# Altium PCB SPI-主板-开关.PcbDoc (part 10 of 11)
Units mm, origin at the board's own origin, x right, y up, seen from the top; angles counter-clockwise.
Board outline 97.69 x 103.45 mm, 2 copper layers (Top Layer, Bottom Layer); 86 components, 63 nets, 260 pads, 250 vias.
Unrouted connection lines stored in the file: 6.
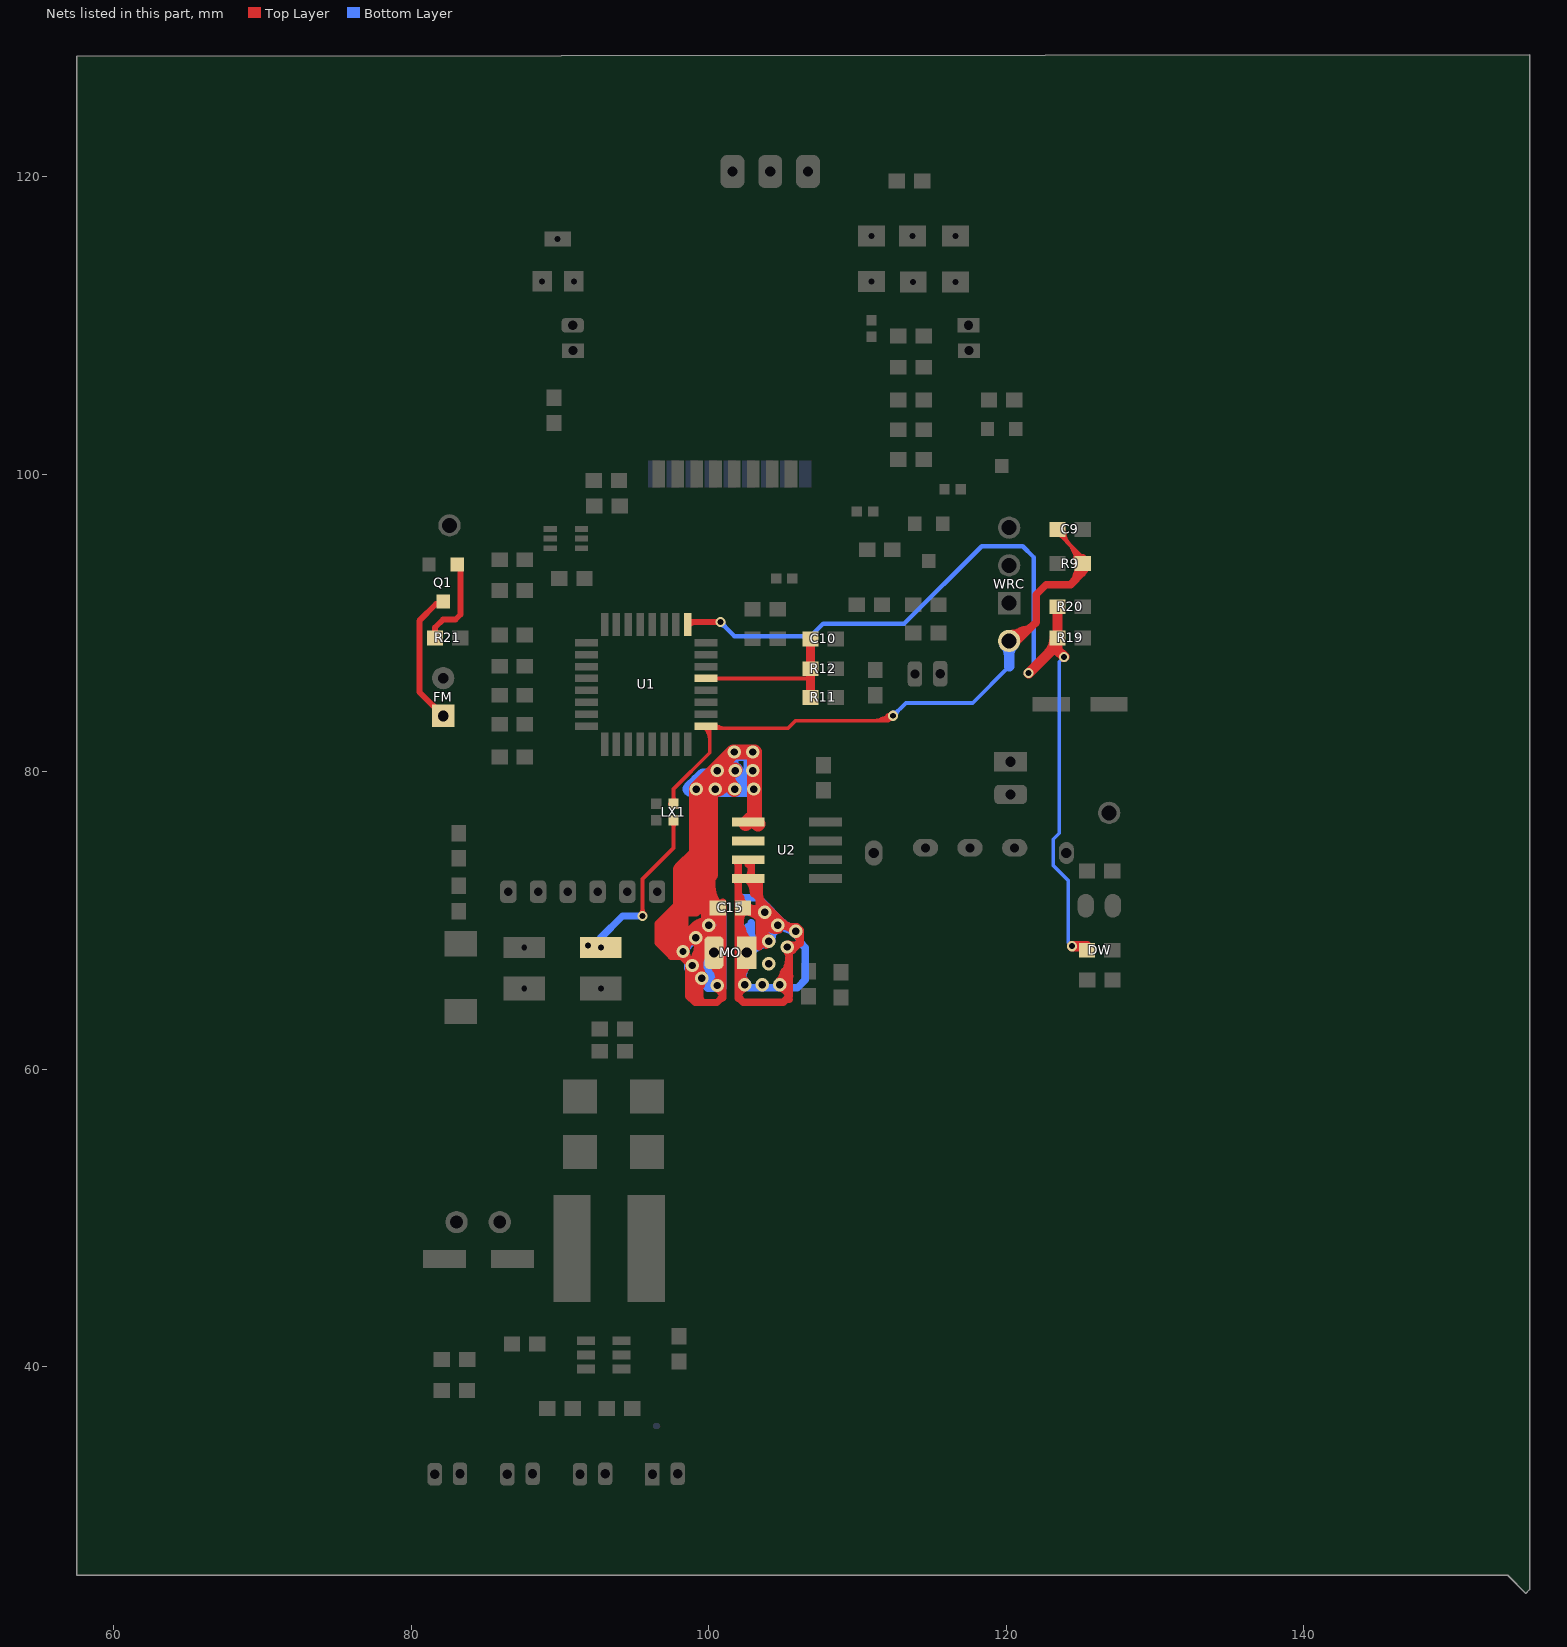
[diagram p10: the nets of this part, all layers, seen from the top]

## Via types
v1: diameter 0.9, hole 0.5, Top Layer to Bottom Layer, 104 vias
v2: diameter 0.68, hole 0.4, Top Layer to Bottom Layer, 100 vias
v3: diameter 1.1, hole 0.6, Top Layer to Bottom Layer, tented both sides, 16 vias
v4: diameter 1, hole 0.8, Top Layer to Bottom Layer, tented both sides, 8 vias
v5: diameter 1, hole 0.6, Top Layer to Bottom Layer, 4 vias
v6: diameter 0.8, hole 0.5, Top Layer to Bottom Layer, 4 vias
v7: diameter 0.7, hole 0.4, Top Layer to Bottom Layer, 4 vias
v8: diameter 0.6, hole 0.4, Top Layer to Bottom Layer, 3 vias
v9: diameter 1.1, hole 0.68, Top Layer to Bottom Layer, 2 vias
v10: diameter 0.8, hole 0.4, Top Layer to Bottom Layer, 2 vias
v11: diameter 1, hole 0.5, Top Layer to Bottom Layer, 1 vias
v12: diameter 0.9, hole 0.6, Top Layer to Bottom Layer, tented bottom, 1 vias
v13: diameter 1.2, hole 0.68, Top Layer to Bottom Layer, 1 vias

## Nets (pads, with @x,y where several pads share a name; then routed paths per layer and width w, separated by ;. In a path a pad name is that pad's centre, name@x,y a point inside that pad or via, vN(x,y) a via of type N, cw(c..) or ccw(c..) an arc to the next point about the centre after c; other vN are vias at no path point) (continued)
NetC4_1: (continued)
  Bottom Layer w1: 99.263,79.375 99.276,79.375 ; v1@99.113,78.832 cw(c99.699,78.952) 99.276,79.375 ; v1@99.113,78.832 cw(c99.699,78.952) 99.276,79.375 ; v1@99.113,78.832 cw(c99.699,78.952) 99.276,79.375 ; v1@99.113,78.832 cw(c99.699,78.952) 99.276,79.375 ; v1@99.113,78.832 cw(c99.699,78.952) 99.276,79.375 ; v1@99.113,78.832 cw(c99.699,78.952) 99.276,79.375 ; v1@99.112,78.842 cw(c100.003,78.842) 99.373,79.472 ; v1@99.112,78.842 cw(c100.003,78.842) 99.373,79.472 ; v1@99.112,78.842 cw(c100.003,78.842) 99.373,79.472 ; v1@99.126,78.877 cw(c100.329,77.675) 100.329,79.375 ; v1@99.126,78.877 cw(c100.329,77.675) 100.329,79.375 ; v1@99.126,78.877 cw(c100.329,77.675) 100.329,79.375 ; 99.276,79.375 ccw(c99.276,81.049) v1@100.624,80.057 ; 99.276,79.375 cw(c99.276,77.702) v1@100.467,78.877 ; 99.276,79.375 ccw(c99.276,81.049) v1@100.624,80.057 ; 99.276,79.375 cw(c99.276,77.702) v1@100.467,78.877 ; 99.276,79.375 ccw(c99.276,81.049) v1@100.624,80.057 ; 99.276,79.375 cw(c99.276,77.702) v1@100.467,78.877 ; 99.276,79.375 99.632,79.731 100.254,79.731 ; 99.276,79.375 98.749,78.848 98.806,78.791 101.194,78.791 ; 99.276,79.375 100.609,79.375 ; 100.254,79.731 cw(c99.614,79.091) v1@100.479,78.827 ; 100.254,79.731 cw(c99.614,79.091) v1@100.479,78.827 ; 100.254,79.731 cw(c99.614,79.091) v1@100.479,78.827 ; 100.254,79.731 100.609,79.375 ; v1@100.388,78.867 cw(c100.935,78.551) 100.772,79.161 ; v1@100.388,78.867 cw(c100.935,78.551) 100.772,79.161 ; v1@100.388,78.867 cw(c100.935,78.551) 100.772,79.161 ; v1@100.388,78.867 cw(c100.935,78.551) 100.772,79.161 ; v1@100.388,78.867 cw(c100.935,78.551) 100.772,79.161 ; v1@100.388,78.867 cw(c100.935,78.551) 100.772,79.161 ; v1@100.396,78.877 cw(c101.108,78.165) 101.108,79.172 ; v1@100.396,78.877 cw(c101.599,77.675) 101.599,79.375 ; v1@100.397,78.877 cw(c100.84,78.425) 101.157,78.973 ; v1@100.396,78.877 cw(c101.108,78.165) 101.108,79.172 ; v1@100.396,78.877 cw(c101.599,77.675) 101.599,79.375 ; v1@100.397,78.877 cw(c100.84,78.425) 101.157,78.973 ; v1@100.397,78.877 cw(c100.84,78.425) 101.157,78.973 ; v1@100.396,78.877 cw(c101.108,78.165) 101.108,79.172 ; v1@100.396,78.877 cw(c101.599,77.675) 101.599,79.375 ; v1@100.397,78.877 cw(c100.84,78.425) 101.157,78.973 ; v1@100.397,78.877 cw(c100.84,78.425) 101.157,78.973 ; v1@100.397,78.877 cw(c100.84,78.425) 101.157,78.973 ; v1@100.405,78.884 cw(c100.74,78.337) 101.194,78.791 ; v1@100.405,78.884 cw(c100.74,78.337) 101.194,78.791 ; v1@100.405,78.884 cw(c100.74,78.337) 101.194,78.791 ; v1@100.425,79.902 cw(c101.273,79.054) v1@101.8,80.131 ; v1@100.425,79.902 cw(c101.273,79.054) v1@101.8,80.131 ; v1@100.425,79.902 cw(c101.273,79.054) v1@101.8,80.131 ; v1@100.425,79.902 v1@101.752,81.229 ; v1@100.453,78.796 ccw(c100.225,79.283) 100.737,79.446 ; v1@100.453,78.796 ccw(c100.225,79.283) 100.737,79.446 ; v1@100.453,78.796 ccw(c100.225,79.283) 100.737,79.446 ; v1@100.535,80.096 ccw(c101.533,79.892) 100.813,79.172 ; v1@100.535,80.096 ccw(c101.533,79.892) 100.813,79.172 ; v1@100.535,80.096 ccw(c101.533,79.892) 100.813,79.172 ; v1@100.535,80.096 ccw(c101.533,79.892) 100.813,79.172 ; v1@100.543,80.115 ccw(c101.019,79.785) 100.609,79.375 ; v1@100.543,80.115 ccw(c101.019,79.785) 100.609,79.375 ; v1@100.543,80.115 ccw(c101.019,79.785) 100.609,79.375 ; v1@100.543,80.115 ccw(c101.019,79.785) 100.609,79.375 ; 100.609,79.375 ccw(c100.609,80.788) v1@101.821,80.06 ; 100.609,79.375 cw(c100.609,77.732) v1@101.788,78.876 ; 100.609,79.375 ccw(c100.609,80.788) v1@101.821,80.06 ; 100.609,79.375 cw(c100.609,77.732) v1@101.788,78.876 ; 100.609,79.375 ccw(c100.609,80.788) v1@101.821,80.06 ; 100.609,79.375 cw(c100.609,77.732) v1@101.788,78.876 ; 100.609,79.375 101.905,79.375 ; 100.609,79.375 100.813,79.172 ; 100.813,79.172 ccw(c100.813,80.193) v1@101.827,80.081 ; 100.813,79.172 ccw(c101.731,80.09) v1@101.753,78.792 ; 100.813,79.172 ccw(c100.813,80.193) v1@101.827,80.081 ; 100.813,79.172 ccw(c101.731,80.09) v1@101.753,78.792 ; 100.813,79.172 ccw(c100.813,80.193) v1@101.827,80.081 ; 100.813,79.172 ccw(c101.731,80.09) v1@101.753,78.792 ; 100.813,79.172 v1@101.702,79.172 ; 100.813,79.172 101.194,78.791 ; 101.076,79.172 cw(c101.076,78.165) v1@101.788,78.877 ; 101.076,79.172 cw(c101.076,78.165) v1@101.788,78.877 ; 101.076,79.172 cw(c101.076,78.165) v1@101.788,78.877 ; 101.194,78.791 103.073,78.791 v1@103.073,81.229 ; 101.235,79.297 cw(c100.996,78.405) v1@101.796,78.867 ; 101.235,79.297 cw(c100.996,78.405) v1@101.796,78.867 ; 101.235,79.297 cw(c100.996,78.405) v1@101.796,78.867 ; v1@101.702,79.172 ccw(c101.155,79.719) v1@101.821,80.112 ; v1@101.702,79.172 cw(c101.702,80.376) 100.536,80.074 ccw(c101.702,80.376) v1@101.702,79.172 ; v1@101.702,79.172 ccw(c101.155,79.719) v1@101.821,80.112 ; v1@101.702,79.172 ccw(c101.155,79.719) v1@101.821,80.112 ; v1@101.702,79.172 101.905,79.375 ; v1@101.703,78.838 cw(c102.397,78.883) 101.905,79.375 ; v1@101.703,78.838 cw(c102.397,78.883) 101.905,79.375 ; v1@101.703,78.838 cw(c102.397,78.883) 101.905,79.375 ; v1@101.715,78.875 cw(c102.845,77.85) 102.845,79.375 ; v1@101.715,78.875 cw(c102.845,77.85) 102.845,79.375 ; v1@101.715,78.875 cw(c102.845,77.85) 102.845,79.375 ; v1@101.733,80.064 ccw(c102.845,80.616) 102.845,79.375 ; v1@101.733,80.064 ccw(c102.845,80.616) 102.845,79.375 ; v1@101.733,80.064 ccw(c102.845,80.616) 102.845,79.375 ; v1@101.742,80.051 cw(c102.347,80.635) v1@101.752,81.229 ; v1@101.742,80.051 cw(c102.347,80.635) v1@101.752,81.229 ; v1@101.742,80.051 cw(c102.347,80.635) v1@101.752,81.229 ; v1@101.752,81.229 v1@103.073,81.229 ; 101.905,79.375 ccw(c101.905,80.616) v1@103.016,80.064 ; 101.905,79.375 cw(c101.905,77.791) v1@103.059,78.876 ; 101.905,79.375 cw(c101.905,81.075) 100.544,80.056 ccw(c101.905,81.075) 101.905,79.375 ; 101.905,79.375 ccw(c101.905,80.616) v1@103.016,80.064 ; 101.905,79.375 cw(c101.905,77.791) v1@103.059,78.876 ; 101.905,79.375 ccw(c101.905,80.616) v1@103.016,80.064 ; 101.905,79.375 cw(c101.905,77.791) v1@103.059,78.876 ; 101.905,79.375 102.845,79.375 ; 102.845,79.375 102.845,81.077 102.921,81.077 v1@103.073,81.229 ; 99.846,79.731 ccw(c99.846,80.824) 100.619,80.051 cw(c99.846,80.824) 99.846,79.731 ; v1@100.534,80.086 ccw(c102.069,80.086) 100.984,79.001 cw(c102.069,80.086) v1@100.534,80.086
  other v1: 100.584,65.634 99.543,66.116 98.908,66.98 98.273,67.92 99.136,68.834 100,69.698 100.432,78.842 101.752,78.842 103.022,78.842 100.584,80.086 101.778,80.086 102.972,80.086 101.727,81.331 102.972,81.331
NetC4_2: C15.2 MO.1 U2.7 U2.8 | length 479.8
  Top Layer w0.5: 101.981,73.762 101.981,64.872 102.337,64.516 105.004,64.516 105.41,64.922 105.41,67.996 105.639,67.996 106.172,68.529 ; 102.22,66.327 ccw(c102.742,66.327) v1@102.504,65.862 ; U2.7@102.654,73.787 102.87,73.787 102.87,72.568 U2.8@103.022,72.568 ; U2.8@103.022,72.695 U2.8@103.022,72.568 ; 103.403,68.224 103.403,70.151 ; 103.403,71.501 103.022,71.882 U2.8@103.022,72.568 ; v1@103.82,70.371 cw(c103.981,69.874) 104.35,70.243 ; v1@104.318,69.621 104.318,69.875 v1@103.48,70.714 ; 104.33,70.264 cw(c103.96,69.894) v1@104.458,69.734 ; v1@104.684,65.862 ccw(c104.446,66.327) 104.968,66.327 ; U2.8@101.819,72.782 cw(c101.427,72.39) 101.981,72.39 ; U2.8@101.819,72.782 cw(c101.427,72.39) 101.981,72.39 ; U2.8@101.819,72.782 cw(c101.427,72.39) 101.981,72.39 ; U2.8@101.819,72.852 ccw(c101.427,73.244) 101.981,73.244 ; U2.8@101.819,72.852 ccw(c101.427,73.244) 101.981,73.244 ; U2.8@101.819,72.852 ccw(c101.427,73.244) 101.981,73.244 ; U2.7@101.819,74.052 cw(c101.427,73.66) 101.981,73.66 ; U2.7@101.819,74.052 cw(c101.427,73.66) 101.981,73.66 ; U2.7@101.819,74.052 cw(c101.427,73.66) 101.981,73.66 ; U2.7@101.824,74.047 cw(c101.598,73.738) 101.981,73.738 ; U2.7@101.824,74.047 cw(c101.598,73.738) 101.981,73.738 ; U2.7@101.824,74.047 cw(c101.598,73.738) 101.981,73.738 ; 101.981,64.764 cw(c102.767,64.764) v1@102.485,65.498 ; 101.981,64.764 cw(c102.767,64.764) v1@102.485,65.498 ; 101.981,64.764 cw(c102.767,64.764) v1@102.485,65.498 ; 101.981,65.271 cw(c104.582,65.271) MO.1@102.743,67.111 ; 101.981,65.271 cw(c104.582,65.271) MO.1@102.743,67.111 ; 101.981,65.271 cw(c104.582,65.271) MO.1@102.743,67.111 ; 101.981,65.492 cw(c102.487,65.492) v1@102.305,65.964 ; 101.981,65.492 cw(c102.487,65.492) v1@102.305,65.964 ; 101.981,65.492 cw(c102.487,65.492) v1@102.305,65.964 ; 101.981,66.003 ccw(c102.731,66.003) v1@102.201,65.472 ; 101.981,66.003 ccw(c102.731,66.003) v1@102.201,65.472 ; 101.981,66.003 ccw(c102.731,66.003) v1@102.201,65.472 ; 101.981,66.478 cw(c103.375,66.478) MO.1@102.389,67.464 ; 101.981,66.478 cw(c103.375,66.478) MO.1@102.389,67.464 ; 101.981,66.478 cw(c103.375,66.478) MO.1@102.389,67.464 ; MO.1@101.981,67.21 ccw(c103.938,67.21) v1@102.554,65.826 ; MO.1@101.981,67.21 ccw(c103.938,67.21) v1@102.554,65.826 ; MO.1@101.981,67.21 ccw(c103.938,67.21) v1@102.554,65.826 ; 101.981,69.208 ccw(c103.375,69.208) MO.1@102.389,68.223 ; 101.981,69.208 ccw(c103.375,69.208) MO.1@102.389,68.223 ; 101.981,69.208 ccw(c103.375,69.208) MO.1@102.389,68.223 ; 101.981,69.573 cw(c103.537,69.573) C15.2@102.437,70.673 ; 101.981,69.573 cw(c103.537,69.573) C15.2@102.437,70.673 ; 101.981,69.573 cw(c103.537,69.573) C15.2@102.437,70.673 ; C15.2@101.981,70.415 ccw(c104.582,70.415) MO.1@102.743,68.576 ; C15.2@101.981,70.415 ccw(c104.582,70.415) MO.1@102.743,68.576 ; C15.2@101.981,70.415 ccw(c104.582,70.415) MO.1@102.743,68.576 ; 101.981,72.127 ccw(c103.537,72.127) C15.2@102.437,71.027 ; 101.981,72.127 ccw(c103.537,72.127) C15.2@102.437,71.027 ; 101.981,72.127 ccw(c103.537,72.127) C15.2@102.437,71.027 ; C15.2@102.063,70.697 cw(c101.637,70.366) 102.104,70.097 ; C15.2@102.063,70.697 cw(c101.637,70.366) 102.104,70.097 ; C15.2@102.063,70.697 cw(c101.637,70.366) 102.104,70.097 ; C15.2@102.063,71.003 ccw(c101.637,71.334) 102.104,71.604 ; C15.2@102.063,71.003 ccw(c101.637,71.334) 102.104,71.604 ; C15.2@102.063,71.003 ccw(c101.637,71.334) 102.104,71.604 ; 102.105,66.603 cw(c101.116,66.032) v1@102.22,65.736 ; 102.105,66.603 cw(c101.116,66.032) v1@102.22,65.736 ; 102.105,66.603 cw(c101.116,66.032) v1@102.22,65.736 ; MO.1@102.134,67.162 cw(c101.358,66.613) 102.181,66.138 ; MO.1@102.134,67.162 cw(c101.358,66.613) 102.181,66.138 ; MO.1@102.134,67.162 cw(c101.358,66.613) 102.181,66.138 ; MO.1@102.134,68.525 ccw(c101.358,69.074) 102.181,69.549 ; MO.1@102.134,68.525 ccw(c101.358,69.074) 102.181,69.549 ; MO.1@102.134,68.525 ccw(c101.358,69.074) 102.181,69.549 ; 102.137,69.835 cw(c102.846,70.025) C15.2@102.446,70.64 ; 102.137,69.835 cw(c102.846,70.025) C15.2@102.446,70.64 ; 102.137,69.835 cw(c102.846,70.025) C15.2@102.446,70.64 ; C15.2@102.36,70.6 cw(c102.36,69.164) 103.375,70.179 ; C15.2@102.36,70.6 cw(c102.36,69.164) 103.375,70.179 ; C15.2@102.36,70.6 cw(c102.36,69.164) 103.375,70.179 ; C15.2@102.485,70.634 cw(c102.879,69.951) 103.083,70.712 ; C15.2@102.485,70.634 cw(c102.879,69.951) 103.083,70.712 ; C15.2@102.485,70.634 cw(c102.879,69.951) 103.083,70.712 ; C15.2@102.503,70.645 cw(c102.762,70.273) 102.988,70.665 ; C15.2@102.503,70.645 cw(c102.762,70.273) 102.988,70.665 ; C15.2@102.503,70.645 cw(c102.762,70.273) 102.988,70.665 ; C15.2@102.537,71.027 ccw(c103.084,71.574) 103.084,70.8 ; C15.2@102.537,71.027 ccw(c103.084,71.574) 103.084,70.8 ; C15.2@102.537,71.027 ccw(c103.084,71.574) 103.084,70.8 ; U2.8@102.619,72.782 cw(c101.656,71.812) 103.022,71.812 ; U2.8@102.619,72.782 cw(c101.656,71.812) 103.022,71.812 ; U2.8@102.619,72.782 cw(c101.656,71.812) 103.022,71.812 ; U2.8@102.619,72.852 ccw(c102.012,73.459) 102.87,73.459 ; U2.8@102.619,72.852 ccw(c102.012,73.459) 102.87,73.459 ; U2.8@102.619,72.852 ccw(c102.012,73.459) 102.87,73.459 ; U2.7@102.619,74.052 cw(c102.012,73.445) 102.87,73.445 ; U2.7@102.619,74.052 cw(c102.012,73.445) 102.87,73.445 ; U2.7@102.619,74.052 cw(c102.012,73.445) 102.87,73.445 ; C15.2@102.755,70.8 cw(c102.755,69.632) v1@103.612,70.425 ; C15.2@102.755,70.8 ccw(c103.244,71.289) v1@103.643,70.724 ; C15.2@102.755,70.8 cw(c102.755,69.632) v1@103.612,70.425 ; C15.2@102.755,70.8 ccw(c103.244,71.289) v1@103.643,70.724 ; C15.2@102.755,70.8 cw(c102.755,69.632) v1@103.612,70.425 ; C15.2@102.755,70.8 ccw(c103.244,71.289) v1@103.643,70.724 ; C15.2@102.755,70.8 103.393,70.8 v1@103.403,70.79 ; C15.2@102.755,70.8 103.403,70.151 ; U2.8@103.022,72.568 103.403,72.568 v1@103.403,70.79 ; 103.174,70.381 ccw(c103.591,70.798) v1@103.932,70.316 ; 103.174,70.381 ccw(c103.591,70.798) v1@103.932,70.316 ; 103.174,70.381 ccw(c103.591,70.798) v1@103.932,70.316 ; 103.179,70.698 ccw(c103.393,71.038) v1@103.637,70.72 ; 103.179,70.698 ccw(c103.393,71.038) v1@103.637,70.72 ; 103.179,70.698 ccw(c103.393,71.038) v1@103.637,70.72 ; 103.403,69.22 cw(c105.1,69.22) v1@103.9,70.42 ; 103.403,69.22 cw(c105.1,69.22) v1@103.9,70.42 ; 103.403,69.22 cw(c105.1,69.22) v1@103.9,70.42 ; 103.403,69.226 ccw(c104.445,69.226) v1@103.874,68.355 ; 103.403,69.226 ccw(c104.445,69.226) v1@103.874,68.355 ; 103.403,69.226 ccw(c104.445,69.226) v1@103.874,68.355 ; 103.403,70.151 ccw(c105.052,70.151) v1@104.148,68.773 ; 103.403,70.151 ccw(c104.233,70.981) v1@104.587,69.863 ; 103.403,70.151 ccw(c105.052,70.151) v1@104.148,68.773 ; 103.403,70.151 ccw(c104.233,70.981) v1@104.587,69.863 ; 103.403,70.151 ccw(c105.052,70.151) v1@104.148,68.773 ; 103.403,70.151 ccw(c104.233,70.981) v1@104.587,69.863 ; 103.403,70.151 104.01,69.545 ; 103.403,70.151 v1@103.403,70.714 ; v1@103.403,70.714 v1@103.403,70.79 ; v1@103.403,70.714 v1@103.48,70.714 ; v1@103.403,70.79 v1@103.48,70.714 ; 103.403,71.45 cw(c102.866,70.913) v1@103.573,70.635 ; 103.403,71.45 cw(c102.866,70.913) v1@103.573,70.635 ; 103.403,71.45 cw(c102.866,70.913) v1@103.573,70.635 ; 103.403,71.45 105.258,69.596 ; 103.403,71.903 ccw(c105.1,71.903) v1@103.9,70.703 ; 103.403,71.903 ccw(c105.1,71.903) v1@103.9,70.703 ; 103.403,71.903 ccw(c105.1,71.903) v1@103.9,70.703 ; v1@103.48,70.714 103.632,70.714 104.8,69.545 104.01,69.545 ; v1@103.485,70.684 ccw(c103.995,70.455) 103.716,69.971 ; v1@103.485,70.684 ccw(c103.995,70.455) 103.716,69.971 ; v1@103.485,70.684 ccw(c103.995,70.455) 103.716,69.971 ; v1@103.485,70.684 ccw(c103.995,70.455) 103.716,69.971 ; v1@103.485,70.684 ccw(c103.995,70.455) 103.716,69.971 ; v1@103.485,70.684 ccw(c103.995,70.455) 103.716,69.971 ; 103.493,68.781 ccw(c103.713,68.978) v1@103.907,68.756 ; 103.493,68.781 ccw(c103.713,68.978) v1@103.907,68.756 ; 103.493,68.781 ccw(c103.713,68.978) v1@103.907,68.756 ; v1@103.511,70.73 ccw(c104.004,70.394) 103.582,69.972 ; v1@103.511,70.73 ccw(c104.004,70.394) 103.582,69.972 ; v1@103.511,70.73 ccw(c104.004,70.394) 103.582,69.972 ; 103.517,69.756 ccw(c102.782,70.18) v1@103.573,70.489 ; 103.517,69.756 ccw(c102.782,70.18) v1@103.573,70.489 ; 103.517,69.756 ccw(c102.782,70.18) v1@103.573,70.489 ; 103.517,71.367 cw(c102.782,70.942) v1@103.573,70.634 ; 103.517,71.367 cw(c102.782,70.942) v1@103.573,70.634 ; 103.517,71.367 cw(c102.782,70.942) v1@103.573,70.634 ; 103.595,69.393 cw(c102.857,68.735) v1@103.84,68.627 ; 103.595,69.393 cw(c102.857,68.735) v1@103.84,68.627 ; 103.595,69.393 cw(c102.857,68.735) v1@103.84,68.627 ; v1@103.759,70.361 cw(c103.759,69.817) 104.144,70.202 ; v1@103.759,70.361 cw(c103.759,68.591) v1@105.011,69.843 ; v1@103.759,70.361 cw(c103.759,69.568) 104.32,70.129 ; v1@103.759,70.361 cw(c103.759,69.817) 104.144,70.202 ; v1@103.759,70.361 cw(c103.759,68.591) v1@105.011,69.843 ; v1@103.759,70.361 cw(c103.759,69.568) 104.32,70.129 ; v1@103.759,70.361 cw(c103.759,69.568) 104.32,70.129 ; v1@103.759,70.361 cw(c103.759,69.568) 104.32,70.129 ; v1@103.759,70.361 cw(c103.759,69.817) 104.144,70.202 ; v1@103.759,70.361 cw(c103.759,68.591) v1@105.011,69.843 ; v1@103.767,70.361 cw(c103.797,69.57) v1@104.483,69.966 ; v1@103.767,70.361 cw(c103.797,69.57) v1@104.483,69.966 ; v1@103.767,70.361 cw(c103.797,69.57) v1@104.483,69.966 ; v1@103.767,70.361 cw(c103.797,69.57) v1@104.483,69.966 ; v1@103.767,70.361 cw(c103.797,69.57) v1@104.483,69.966 ; v1@103.767,70.361 cw(c103.797,69.57) v1@104.483,69.966 ; v1@103.924,70.449 ccw(c104.513,70.048) 104.01,69.545 ; v1@103.924,70.449 ccw(c104.513,70.048) 104.01,69.545 ; v1@103.924,70.449 ccw(c104.513,70.048) 104.01,69.545 ; v1@103.929,70.924 cw(c102.677,69.672) v1@104.448,69.672 ; v1@103.929,70.924 cw(c102.677,69.672) v1@104.448,69.672 ; v1@103.929,70.924 cw(c102.677,69.672) v1@104.448,69.672 ; v1@103.932,70.661 ccw(c104.922,71.232) 104.626,70.129 ; v1@103.932,70.661 ccw(c104.922,71.232) 104.626,70.129 ; v1@103.932,70.661 ccw(c104.922,71.232) 104.626,70.129 ; v1@103.959,70.561 ccw(c104.748,70.561) 104.19,70.003 ; v1@103.959,70.561 ccw(c104.748,70.561) 104.19,70.003 ; v1@103.959,70.561 ccw(c104.748,70.561) 104.19,70.003 ; 103.985,69.57 ccw(c104.513,70.098) v1@104.739,69.386 ; 103.985,69.57 ccw(c104.513,70.098) v1@104.739,69.386 ; 103.985,69.57 ccw(c104.513,70.098) v1@104.739,69.386 ; 104.01,69.545 ccw(c104.01,70.132) v1@104.486,69.789 ; 104.01,69.545 ccw(c104.01,70.132) v1@104.486,69.789 ; 104.01,69.545 ccw(c104.01,70.132) v1@104.486,69.789 ; v1@104.053,70.396 cw(c103.657,69.71) v1@104.448,69.68 ; v1@104.053,70.396 cw(c103.657,69.71) v1@104.448,69.68 ; v1@104.053,70.396 cw(c103.657,69.71) v1@104.448,69.68 ; 104.09,70.103 ccw(c104.648,70.662) v1@104.648,69.872 ; 104.09,70.103 ccw(c104.648,70.662) v1@104.648,69.872 ; 104.09,70.103 ccw(c104.648,70.662) v1@104.648,69.872 ; 104.216,70.233 cw(c103.655,69.672) v1@104.448,69.672 ; 104.216,70.233 cw(c103.655,69.672) v1@104.448,69.672 ; 104.216,70.233 cw(c103.655,69.672) v1@104.448,69.672 ; 104.216,70.233 cw(c103.655,69.672) v1@104.448,69.672 ; 104.216,70.539 ccw(c105.319,70.835) v1@104.748,69.845 ; 104.216,70.539 ccw(c105.319,70.835) v1@104.748,69.845 ; 104.216,70.539 ccw(c105.319,70.835) v1@104.748,69.845 ; 104.289,70.057 cw(c103.904,69.672) v1@104.448,69.672 ; 104.289,70.057 cw(c103.904,69.672) v1@104.448,69.672 ; 104.289,70.057 cw(c103.904,69.672) v1@104.448,69.672 ; v1@104.634,65.826 ccw(c102.759,67.7) 105.41,67.7 ; v1@104.634,65.826 ccw(c102.759,67.7) 105.41,67.7 ; v1@104.634,65.826 ccw(c102.759,67.7) 105.41,67.7 ; v1@104.741,65.487 cw(c104.603,64.693) 105.41,64.693 ; v1@104.741,65.487 cw(c104.603,64.693) 105.41,64.693 ; v1@104.741,65.487 cw(c104.603,64.693) 105.41,64.693 ; v1@104.777,65.884 ccw(c104.786,66.644) 105.444,66.264 ; v1@104.777,65.884 ccw(c104.786,66.644) 105.444,66.264 ; v1@104.777,65.884 ccw(c104.786,66.644) 105.444,66.264 ; v1@104.789,69.814 ccw(c105.315,70.339) 105.315,69.596 ; v1@104.789,69.814 ccw(c105.315,70.339) 105.315,69.596 ; v1@104.789,69.814 ccw(c105.315,70.339) 105.315,69.596 ; v1@104.795,69.536 cw(c105.143,69.213) 105.38,69.624 ; v1@104.795,69.536 cw(c105.143,69.213) 105.38,69.624 ; v1@104.795,69.536 cw(c105.143,69.213) 105.38,69.624 ; v1@104.795,69.536 cw(c105.143,69.213) 105.38,69.624 ; v1@104.795,69.536 cw(c105.143,69.213) 105.38,69.624 ; v1@104.795,69.536 cw(c105.143,69.213) 105.38,69.624 ; v1@104.798,69.804 ccw(c105.258,70.207) 105.258,69.596 ; v1@104.798,69.804 ccw(c105.258,70.207) 105.258,69.596 ; v1@104.798,69.804 ccw(c105.258,70.207) 105.258,69.596 ; v1@104.826,65.98 cw(c104.706,65.286) 105.41,65.286 ; v1@104.826,65.98 cw(c104.706,65.286) 105.41,65.286 ; v1@104.826,65.98 cw(c104.706,65.286) 105.41,65.286 ; v1@104.968,65.736 cw(c106.072,66.032) 105.082,66.603 ; v1@104.968,65.736 cw(c106.072,66.032) 105.082,66.603 ; v1@104.968,65.736 cw(c106.072,66.032) 105.082,66.603 ; v1@104.987,65.472 ccw(c103.966,66.493) 105.41,66.493 ; v1@104.987,65.472 ccw(c103.966,66.493) 105.41,66.493 ; v1@104.987,65.472 ccw(c103.966,66.493) 105.41,66.493 ; v1@105.023,69.83 ccw(c105.842,70.649) v1@105.842,69.491 ; v1@105.023,69.83 ccw(c105.842,70.649) v1@105.842,69.491 ; v1@105.023,69.83 ccw(c105.842,70.649) v1@105.842,69.491 ; v1@105.142,68.083 cw(c104.494,67.435) 105.41,67.435 ; v1@105.142,68.083 cw(c104.494,67.435) 105.41,67.435 ; v1@105.142,68.083 cw(c104.494,67.435) 105.41,67.435 ; 105.258,69.596 cw(c105.258,69.206) v1@105.644,69.262 ; 105.258,69.596 ccw(c105.608,69.947) v1@105.775,69.48 ; 105.258,69.596 cw(c105.258,69.206) v1@105.644,69.262 ; 105.258,69.596 ccw(c105.608,69.947) v1@105.775,69.48 ; 105.258,69.596 cw(c105.258,69.206) v1@105.644,69.262 ; 105.258,69.596 ccw(c105.608,69.947) v1@105.775,69.48 ; 105.258,69.596 105.918,69.596 106.172,69.342 106.172,68.529 ; v1@105.374,68.403 ccw(c105.686,69.015) 106.172,68.529 ; v1@105.374,68.403 ccw(c105.686,69.015) 106.172,68.529 ; v1@105.374,68.403 ccw(c105.686,69.015) 106.172,68.529 ; v1@105.758,69.11 cw(c105.457,68.461) 106.172,68.461 ; v1@105.758,69.11 cw(c105.457,68.461) 106.172,68.461 ; v1@105.758,69.11 cw(c105.457,68.461) 106.172,68.461 ; v1@106.013,69.187 ccw(c106.237,69.051) 106.069,68.85 ; v1@106.013,69.187 ccw(c106.237,69.051) 106.069,68.85 ; v1@106.013,69.187 ccw(c106.237,69.051) 106.069,68.85
  Bottom Layer w0.5: MO.1@102.583,68.674 ccw(c102.904,69.669) 103.643,68.93 ; MO.1@102.616,68.17 102.616,69.571 ; 103.447,68.287 cw(c103.817,67.918) v1@103.977,68.415 ; v1@103.82,70.371 cw(c103.981,69.874) 104.35,70.243 ; v1@104.223,68.681 cw(c104.678,68.868) 104.314,69.198 ; v1@104.238,68.622 cw(c105.227,68.705) v1@104.491,69.371 ; 104.33,70.264 cw(c103.96,69.894) v1@104.458,69.734 ; 104.423,69.239 cw(c104.86,69.015) v1@104.709,69.482 ; 104.428,69.248 ccw(c104.005,69.465) v1@104.458,69.611 ; v1@102.083,65.517 cw(c104.337,65.517) MO.1@102.743,67.111 ; v1@102.083,65.517 cw(c104.337,65.517) MO.1@102.743,67.111 ; v1@102.083,65.517 cw(c104.337,65.517) MO.1@102.743,67.111 ; 102.083,66.724 cw(c103.13,66.724) MO.1@102.389,67.464 ; 102.083,66.724 cw(c103.13,66.724) MO.1@102.389,67.464 ; 102.083,66.724 cw(c103.13,66.724) MO.1@102.389,67.464 ; MO.1@102.083,66.964 ccw(c103.693,66.964) v1@102.554,65.826 ; MO.1@102.083,66.964 ccw(c103.693,66.964) v1@102.554,65.826 ; MO.1@102.083,66.964 ccw(c103.693,66.964) v1@102.554,65.826 ; 102.083,68.963 ccw(c103.13,68.963) MO.1@102.389,68.223 ; 102.083,68.963 ccw(c103.13,68.963) MO.1@102.389,68.223 ; 102.083,68.963 ccw(c103.13,68.963) MO.1@102.389,68.223 ; 102.083,70.17 ccw(c104.337,70.17) MO.1@102.743,68.576 ; 102.083,70.17 ccw(c104.337,70.17) MO.1@102.743,68.576 ; 102.083,70.17 ccw(c104.337,70.17) MO.1@102.743,68.576 ; MO.1@102.171,67.117 cw(c101.673,66.639) 102.271,66.293 ; MO.1@102.171,67.117 cw(c101.673,66.639) 102.271,66.293 ; MO.1@102.171,67.117 cw(c101.673,66.639) 102.271,66.293 ; MO.1@102.171,68.57 ccw(c101.673,69.048) 102.271,69.394 ; MO.1@102.171,68.57 ccw(c101.673,69.048) 102.271,69.394 ; MO.1@102.171,68.57 ccw(c101.673,69.048) 102.271,69.394 ; MO.1@102.187,68.586 ccw(c101.271,69.571) 102.616,69.571 ; MO.1@102.187,68.586 ccw(c101.271,69.571) 102.616,69.571 ; MO.1@102.187,68.586 ccw(c101.271,69.571) 102.616,69.571 ; 102.193,66.451 cw(c101.537,66.072) v1@102.23,65.765 ; 102.193,66.451 cw(c101.537,66.072) v1@102.23,65.765 ; 102.193,66.451 cw(c101.537,66.072) v1@102.23,65.765 ; MO.1@102.225,68.617 ccw(c101.317,69.869) 102.863,69.869 ; MO.1@102.225,68.617 ccw(c101.317,69.869) 102.863,69.869 ; MO.1@102.225,68.617 ccw(c101.317,69.869) 102.863,69.869 ; MO.1@102.373,68.343 cw(c103.307,67.805) MO.1@103.028,68.846 ; MO.1@102.373,68.343 cw(c103.307,67.805) MO.1@103.028,68.846 ; MO.1@102.373,68.343 cw(c103.307,67.805) MO.1@103.028,68.846 ; MO.1@102.46,68.193 ccw(c102.46,70.012) v1@103.746,68.726 ; MO.1@102.46,68.193 ccw(c102.46,70.012) v1@103.746,68.726 ; MO.1@102.46,68.193 ccw(c102.46,70.012) v1@103.746,68.726 ; MO.1@102.46,68.693 ccw(c102.46,71.719) v1@104.6,69.58 ; MO.1@102.46,68.693 ccw(c102.46,71.719) v1@104.6,69.58 ; MO.1@102.46,68.693 ccw(c102.46,71.719) v1@104.6,69.58 ; MO.1@102.519,68.212 ccw(c102.028,68.888) MO.1@102.863,68.888 ; MO.1@102.519,68.212 ccw(c102.028,68.888) MO.1@102.863,68.888 ; MO.1@102.519,68.212 ccw(c102.028,68.888) MO.1@102.863,68.888 ; 102.678,69.175 ccw(c103.007,68.909) MO.1@102.726,68.592 ; 102.678,69.175 ccw(c103.007,68.909) MO.1@102.726,68.592 ; 102.678,69.175 ccw(c103.007,68.909) MO.1@102.726,68.592 ; MO.1@102.73,68.588 ccw(c103.221,69.125) 103.409,68.422 ; MO.1@102.73,68.588 ccw(c103.221,69.125) 103.409,68.422 ; MO.1@102.73,68.588 ccw(c103.221,69.125) 103.409,68.422 ; MO.1@102.73,68.588 ccw(c103.221,69.125) 103.409,68.422 ; MO.1@102.776,68.539 ccw(c103.101,68.792) MO.1@103.208,68.394 ; MO.1@102.776,68.539 ccw(c103.101,68.792) MO.1@103.208,68.394 ; MO.1@102.776,68.539 ccw(c103.101,68.792) MO.1@103.208,68.394 ; MO.1@102.806,68.093 cw(c103.357,67.775) MO.1@103.193,68.39 ; MO.1@102.806,68.093 cw(c103.285,67.817) MO.1@103.142,68.351 ; MO.1@102.806,68.093 cw(c104.785,66.951) 104.194,69.158 ; MO.1@102.806,68.093 cw(c103.357,67.775) MO.1@103.193,68.39 ; MO.1@102.806,68.093 cw(c103.285,67.817) MO.1@103.142,68.351 ; MO.1@102.806,68.093 cw(c103.357,67.775) MO.1@103.193,68.39 ; MO.1@102.806,68.093 cw(c103.285,67.817) MO.1@103.142,68.351 ; MO.1@102.806,68.093 cw(c103.285,67.817) MO.1@103.142,68.351 ; MO.1@102.806,68.093 cw(c104.785,66.951) 104.194,69.158 ; MO.1@102.806,68.093 cw(c104.785,66.951) 104.194,69.158 ; MO.1@102.823,68.109 cw(c103.678,67.213) v1@103.988,68.412 ; MO.1@102.823,68.109 cw(c103.678,67.213) v1@103.988,68.412 ; MO.1@102.823,68.109 cw(c103.678,67.213) v1@103.988,68.412 ; MO.1@102.823,68.109 cw(c103.678,67.213) v1@103.988,68.412 ; 102.863,69.869 102.863,67.843 v1@104.616,69.596 ; MO.1@102.992,67.972 cw(c104.038,66.926) v1@104.038,68.405 ; MO.1@102.992,67.972 cw(c104.038,66.926) v1@104.038,68.405 ; MO.1@102.992,67.972 cw(c104.038,66.926) v1@104.038,68.405 ; MO.1@103.056,68.328 cw(c103.612,67.365) v1@103.973,68.416 ; MO.1@103.056,68.328 cw(c103.612,67.365) v1@103.973,68.416 ; MO.1@103.056,68.328 cw(c103.612,67.365) v1@103.973,68.416 ; MO.1@103.056,68.328 cw(c103.612,67.365) v1@103.973,68.416 ; MO.1@103.056,68.328 cw(c103.612,67.365) v1@103.973,68.416 ; MO.1@103.056,68.328 cw(c103.612,67.365) v1@103.973,68.416 ; MO.1@103.172,68.173 ccw(c102.876,69.277) v1@103.865,68.705 ; MO.1@103.172,68.173 ccw(c102.876,69.277) v1@103.865,68.705 ; MO.1@103.172,68.173 ccw(c102.876,69.277) v1@103.865,68.705 ; 103.271,68.465 ccw(c103.321,69.186) v1@103.883,68.731 ; 103.271,68.465 ccw(c103.321,69.186) v1@103.883,68.731 ; 103.271,68.465 ccw(c103.321,69.186) v1@103.883,68.731 ; 103.271,68.465 ccw(c103.321,69.186) v1@103.883,68.731 ; 103.327,71.526 cw(c102.667,70.866) v1@103.566,70.615 ; 103.327,71.526 cw(c102.667,70.866) v1@103.566,70.615 ; 103.327,71.526 cw(c102.667,70.866) v1@103.566,70.615 ; 103.327,71.526 105.258,69.596 ; 103.327,71.526 102.083,71.526 102.083,65.481 105.969,65.481 106.502,66.015 106.502,68.174 106.147,68.529 106.147,69.266 105.816,69.596 105.258,69.596 ; 103.474,68.73 cw(c103.943,68.238) v1@104.114,68.896 ; 103.474,68.73 cw(c103.943,68.238) v1@104.114,68.896 ; 103.474,68.73 cw(c103.943,68.238) v1@104.114,68.896 ; 103.474,68.73 cw(c103.943,68.238) v1@104.114,68.896 ; v1@103.532,70.757 ccw(c103.91,70.431) 103.557,70.078 ; v1@103.532,70.757 ccw(c103.91,70.431) 103.557,70.078 ; v1@103.532,70.757 ccw(c103.91,70.431) 103.557,70.078 ; v1@103.621,70.416 cw(c102.919,69.68) 103.937,69.68 ; v1@103.621,70.416 cw(c102.919,69.68) 103.937,69.68 ; v1@103.621,70.416 cw(c102.919,69.68) 103.937,69.68 ; 103.632,69.772 cw(c104.548,69.772) v1@103.9,70.42 ; 103.632,69.772 cw(c104.548,69.772) v1@103.9,70.42 ; 103.632,69.772 cw(c104.548,69.772) v1@103.9,70.42 ; 103.632,69.939 cw(c104.188,69.939) v1@103.873,70.397 ; 103.632,69.939 cw(c104.188,69.939) v1@103.873,70.397 ; 103.632,69.939 cw(c104.188,69.939) v1@103.873,70.397 ; 103.708,69.956 cw(c104.364,69.956) v1@103.9,70.42 ; 103.708,69.956 cw(c104.364,69.956) v1@103.9,70.42 ; 103.708,69.956 cw(c104.364,69.956) v1@103.9,70.42 ; 103.708,70.025 cw(c104.206,70.025) v1@103.887,70.408 ; 103.708,70.025 cw(c104.206,70.025) v1@103.887,70.408 ; 103.708,70.025 cw(c104.206,70.025) v1@103.887,70.408 ; v1@103.739,68.584 cw(c104.398,68.631) 104.018,69.172 ; v1@103.739,68.584 cw(c104.398,68.631) 104.018,69.172 ; v1@103.739,68.584 cw(c104.398,68.631) 104.018,69.172 ; v1@103.739,68.584 cw(c104.398,68.631) 104.018,69.172 ; v1@103.739,68.584 cw(c104.398,68.631) 104.018,69.172 ; v1@103.739,68.584 cw(c104.398,68.631) 104.018,69.172 ; v1@103.74,68.57 cw(c104.249,68.63) 104.064,69.108 ; v1@103.74,68.57 cw(c104.249,68.63) 104.064,69.108 ; v1@103.74,68.57 cw(c104.249,68.63) 104.064,69.108 ; v1@103.74,68.57 cw(c104.249,68.63) 104.064,69.108 ; v1@103.759,70.361 cw(c103.759,68.591) v1@105.011,69.843 ; v1@103.759,70.361 cw(c103.759,69.568) 104.32,70.129 ; v1@103.759,70.361 cw(c103.759,68.591) v1@105.011,69.843 ; v1@103.759,70.361 cw(c103.759,69.568) 104.32,70.129 ; v1@103.759,70.361 cw(c103.759,69.568) 104.32,70.129 ; v1@103.759,70.361 cw(c103.759,69.568) 104.32,70.129 ; v1@103.759,70.361 cw(c103.759,68.591) v1@105.011,69.843 ; v1@103.767,70.361 cw(c103.797,69.57) v1@104.483,69.966 ; v1@103.767,70.361 cw(c103.797,69.57) v1@104.483,69.966 ; v1@103.767,70.361 cw(c103.797,69.57) v1@104.483,69.966 ; v1@103.767,70.361 cw(c103.797,69.57) v1@104.483,69.966 ; v1@103.767,70.361 cw(c103.797,69.57) v1@104.483,69.966 ; v1@103.767,70.361 cw(c103.797,69.57) v1@104.483,69.966 ; 103.844,70.052 cw(c104.09,70.202) v1@103.894,70.414 ; 103.844,70.052 cw(c104.09,70.202) v1@103.894,70.414 ; 103.844,70.052 cw(c104.09,70.202) v1@103.894,70.414 ; v1@103.91,70.43 ccw(c104.317,70.078) 103.937,69.698 ; v1@103.91,70.43 ccw(c104.317,70.078) 103.937,69.698 ; v1@103.91,70.43 ccw(c104.317,70.078) 103.937,69.698 ; v1@103.929,70.924 cw(c102.677,69.672) v1@104.448,69.672 ; v1@103.929,70.924 cw(c102.677,69.672) v1@104.448,69.672 ; v1@103.929,70.924 cw(c102.677,69.672) v1@104.448,69.672 ; v1@103.93,68.773 ccw(c103.31,69.733) v1@104.427,69.493 ; v1@103.93,68.773 ccw(c103.31,69.733) v1@104.427,69.493 ; v1@103.93,68.773 ccw(c103.31,69.733) v1@104.427,69.493 ; v1@103.932,70.661 ccw(c104.922,71.232) 104.626,70.129 ; v1@103.932,70.661 ccw(c104.922,71.232) 104.626,70.129 ; v1@103.932,70.661 ccw(c104.922,71.232) 104.626,70.129 ; 103.937,69.698 103.937,69.545 103.759,69.367 103.632,69.494 103.632,69.952 103.708,70.028 103.708,69.926 103.937,69.698 ; 103.937,69.698 v1@103.937,70.275 ; 103.937,69.698 104.038,69.596 ; v1@103.937,70.275 103.937,70.421 103.625,70.732 103.48,70.732 v1@103.937,70.275 ; v1@103.937,70.275 v1@104.616,69.596 ; v1@103.959,70.561 ccw(c104.703,70.561) 104.177,70.035 ; v1@103.959,70.561 ccw(c104.703,70.561) 104.177,70.035 ; v1@103.959,70.561 ccw(c104.703,70.561) 104.177,70.035 ; 104.038,69.596 ccw(c104.038,70.207) v1@104.498,69.804 ; 104.038,69.596 ccw(c104.038,70.207) v1@104.498,69.804 ; 104.038,69.596 ccw(c104.038,70.207) v1@104.498,69.804 ; 104.038,69.596 v1@104.616,69.596 ; v1@104.053,70.396 cw(c103.657,69.71) v1@104.448,69.68 ; v1@104.053,70.396 cw(c103.657,69.71) v1@104.448,69.68 ; v1@104.053,70.396 cw(c103.657,69.71) v1@104.448,69.68 ; 104.122,70.09 ccw(c104.648,70.616) v1@104.648,69.872 ; 104.122,70.09 ccw(c104.648,70.616) v1@104.648,69.872 ; 104.122,70.09 ccw(c104.648,70.616) v1@104.648,69.872 ; 104.141,69.315 ccw(c103.804,69.898) v1@104.455,69.724 ; 104.141,69.315 ccw(c103.804,69.898) v1@104.455,69.724 ; 104.141,69.315 ccw(c103.804,69.898) v1@104.455,69.724 ; 104.141,69.315 ccw(c103.804,69.898) v1@104.455,69.724 ; 104.141,69.315 ccw(c103.804,69.898) v1@104.455,69.724 ; 104.141,69.315 ccw(c103.804,69.898) v1@104.455,69.724 ; 104.199,69.048 cw(c104.978,68.649) v1@104.709,69.482 ; 104.199,69.048 cw(c104.978,68.649) v1@104.709,69.482 ; 104.199,69.048 cw(c104.978,68.649) v1@104.709,69.482 ; 104.199,69.048 cw(c104.978,68.649) v1@104.709,69.482 ; 104.216,70.233 cw(c103.655,69.672) v1@104.448,69.672 ; 104.216,70.233 cw(c103.655,69.672) v1@104.448,69.672 ; 104.216,70.233 cw(c103.655,69.672) v1@104.448,69.672 ; 104.216,70.233 cw(c103.655,69.672) v1@104.448,69.672 ; 104.216,70.539 ccw(c105.319,70.835) v1@104.748,69.845 ; 104.216,70.539 ccw(c105.319,70.835) v1@104.748,69.845 ; 104.216,70.539 ccw(c105.319,70.835) v1@104.748,69.845 ; v1@104.238,68.615 cw(c105.532,68.68) v1@104.616,69.596 ; v1@104.238,68.615 cw(c105.532,68.68) v1@104.616,69.596 ; v1@104.238,68.615 cw(c105.532,68.68) v1@104.616,69.596 ; v1@104.238,68.62 cw(c105.423,68.706) v1@104.74,69.678 ; v1@104.238,68.62 cw(c105.423,68.706) v1@104.74,69.678 ; v1@104.238,68.62 cw(c105.423,68.706) v1@104.74,69.678 ; v1@104.238,68.62 cw(c105.423,68.706) v1@104.74,69.678 ; v1@104.238,68.62 cw(c105.423,68.706) v1@104.74,69.678 ; v1@104.238,68.62 cw(c105.423,68.706) v1@104.74,69.678 ; 104.275,69.255 ccw(c103.858,69.672) v1@104.448,69.672 ; 104.275,69.255 ccw(c103.858,69.672) v1@104.448,69.672 ; 104.275,69.255 ccw(c103.858,69.672) v1@104.448,69.672 ; 104.353,69.216 ccw(c103.987,69.523) v1@104.453,69.628 ; 104.353,69.216 ccw(c103.987,69.523) v1@104.453,69.628 ; 104.353,69.216 ccw(c103.987,69.523) v1@104.453,69.628 ; 104.353,69.216 ccw(c103.987,69.523) v1@104.453,69.628 ; 104.353,69.216 ccw(c103.987,69.523) v1@104.453,69.628 ; 104.353,69.216 ccw(c103.987,69.523) v1@104.453,69.628 ; 104.353,69.216 ccw(c103.987,69.523) v1@104.453,69.628 ; 104.353,69.216 ccw(c103.987,69.523) v1@104.453,69.628 ; 104.353,69.216 ccw(c103.987,69.523) v1@104.453,69.628 ; 104.353,69.216 ccw(c103.987,69.523) v1@104.453,69.628 ; 104.403,69.227 ccw(c103.954,69.486) v1@104.455,69.62 ; 104.403,69.227 ccw(c103.954,69.486) v1@104.455,69.62 ; 104.403,69.227 ccw(c103.954,69.486) v1@104.455,69.62 ; 104.403,69.227 ccw(c103.954,69.486) v1@104.455,69.62 ; 104.403,69.227 ccw(c103.954,69.486) v1@104.455,69.62 ; 104.403,69.227 ccw(c103.954,69.486) v1@104.455,69.62 ; 104.428,69.271 cw(c104.816,69.047) v1@104.7,69.479 ; 104.428,69.271 cw(c104.816,69.047) v1@104.7,69.479 ; 104.428,69.271 cw(c104.816,69.047) v1@104.7,69.479 ; 104.428,69.271 cw(c104.816,69.047) v1@104.7,69.479 ; 104.428,69.271 cw(c104.816,69.047) v1@104.7,69.479 ; 104.428,69.271 cw(c104.816,69.047) v1@104.7,69.479 ; v1@104.616,69.596 105.258,69.596 ; v1@104.623,69.596 cw(c104.623,68.073) v1@105.7,69.15 ; v1@104.623,69.596 cw(c104.623,68.073) v1@105.7,69.15 ; v1@104.623,69.596 cw(c104.623,68.073) v1@105.7,69.15 ; v1@104.789,69.814 ccw(c105.315,70.339) 105.315,69.596 ; v1@104.789,69.814 ccw(c105.315,70.339) 105.315,69.596 ; v1@104.789,69.814 ccw(c105.315,70.339) 105.315,69.596 ; v1@104.795,69.536 cw(c105.143,69.213) 105.38,69.624 ; v1@104.795,69.536 cw(c105.143,69.213) 105.38,69.624 ; v1@104.795,69.536 cw(c105.143,69.213) 105.38,69.624 ; v1@104.795,69.536 cw(c105.143,69.213) 105.38,69.624 ; v1@104.795,69.536 cw(c105.143,69.213) 105.38,69.624 ; v1@104.795,69.536 cw(c105.143,69.213) 105.38,69.624 ; v1@104.798,69.804 ccw(c105.258,70.207) 105.258,69.596 ; v1@104.798,69.804 ccw(c105.258,70.207) 105.258,69.596 ; v1@104.798,69.804 ccw(c105.258,70.207) 105.258,69.596 ; v1@104.798,69.804 ccw(c105.258,70.207) 105.258,69.596 ; v1@104.798,69.804 ccw(c105.258,70.207) 105.258,69.596 ; v1@104.798,69.804 ccw(c105.258,70.207) 105.258,69.596 ; v1@104.821,69.772 ccw(c105.476,70.15) 105.28,69.42 ; v1@104.821,69.772 ccw(c105.476,70.15) 105.28,69.42 ; v1@104.821,69.772 ccw(c105.476,70.15) 105.28,69.42 ; v1@104.821,69.772 ccw(c105.476,70.15) 105.28,69.42 ; v1@104.821,69.772 ccw(c105.476,70.15) 105.28,69.42 ; v1@104.821,69.772 ccw(c105.476,70.15) 105.28,69.42 ; v1@105.023,69.83 ccw(c105.842,70.649) v1@105.842,69.491 ; v1@105.023,69.83 ccw(c105.842,70.649) v1@105.842,69.491 ; v1@105.023,69.83 ccw(c105.842,70.649) v1@105.842,69.491 ; 105.114,69.488 ccw(c105.45,70.07) v1@105.752,69.47 ; 105.114,69.488 ccw(c105.45,70.07) v1@105.752,69.47 ; 105.114,69.488 ccw(c105.45,70.07) v1@105.752,69.47 ; 105.258,69.596 cw(c105.258,69.206) v1@105.644,69.262 ; 105.258,69.596 cw(c105.258,69.206) v1@105.644,69.262 ; 105.258,69.596 ccw(c105.608,69.947) v1@105.775,69.48 ; 105.258,69.596 cw(c105.258,69.206) v1@105.644,69.262 ; 105.258,69.596 cw(c105.258,69.206) v1@105.644,69.262 ; 105.258,69.596 ccw(c105.608,69.947) v1@105.775,69.48 ; 105.258,69.596 cw(c105.258,69.206) v1@105.644,69.262 ; 105.258,69.596 cw(c105.258,69.206) v1@105.644,69.262 ; 105.258,69.596 ccw(c105.608,69.947) v1@105.775,69.48 ; v1@105.752,69.113 cw(c105.427,68.471) 106.147,68.471 ; v1@105.752,69.113 cw(c105.427,68.471) 106.147,68.471 ; v1@105.752,69.113 cw(c105.427,68.471) 106.147,68.471
  other v1: 102.413,65.684 103.607,65.684 104.775,65.684 104.038,67.107 105.283,68.224 104.038,68.605 105.842,69.291 104.648,69.672 103.759,70.561
PB7: C10.2 R11.1 R12.2 U1.5 | length 12.5
  Top Layer w0.254: U1.5@99.825,86.277 106.915,86.277 ; U1.5@100.437,86.19 cw(c100.647,85.98) 100.647,86.277 ; U1.5@100.437,86.19 cw(c100.647,85.98) 100.647,86.277 ; U1.5@100.437,86.19 cw(c100.647,85.98) 100.647,86.277 ; U1.5@100.437,86.364 ccw(c100.647,86.574) 100.647,86.277 ; U1.5@100.437,86.364 ccw(c100.647,86.574) 100.647,86.277 ; U1.5@100.437,86.364 ccw(c100.647,86.574) 100.647,86.277
  Top Layer w0.6: R11.1@106.85,84.932 R12.2@106.85,86.932 C10.2@106.85,88.932
Q1: FM.2 Q1.3 | length 9.1
  Top Layer w0.4: Q1.3@82.144,91.282 81.67,91.282 80.543,90.155 80.543,85.367 FM.2@82.15,83.76
R10: 
R19: DW.2 R19.2 R20.2 U1.9 | length 69.2
  Top Layer w0.4: U1.9@98.6,89.902 98.766,90.068 v2(100.787,90.068) ; U1.9@98.635,89.867 cw(c99.122,89.381) 99.122,90.068 ; U1.9@98.635,89.867 cw(c99.122,89.381) 99.122,90.068 ; U1.9@98.635,89.867 cw(c99.122,89.381) 99.122,90.068
  Top Layer w0.7: v2@121.526,86.627 R19.2@123.45,88.55 ; R19.2@123.45,89 R19.2@123.45,88.55 ; R19.2@123.45,89.2 R20.2@123.45,91.059 ; v2(123.901,87.732) 123.45,88.183 R19.2@123.45,88.55 ; v2(124.435,68.275) DW.2@125.439,68.275 ; 122.791,87.891 ccw(c121.682,89) R19.2@123.25,89 ; 122.791,87.891 ccw(c121.682,89) R19.2@123.25,89 ; 122.791,87.891 ccw(c121.682,89) R19.2@123.25,89
  Bottom Layer w0.254: v2(123.901,87.732) 123.571,87.401 123.571,75.87 123.165,75.463 123.165,73.711 124.181,72.695 124.181,68.529 v2(124.435,68.275)
  Bottom Layer w0.3: v2(100.787,90.068) 101.727,89.129 106.858,89.129 107.696,89.967 113.157,89.967 118.364,95.174 121.107,95.174 121.844,94.437 121.844,86.97 v2(121.514,86.639) ; v2@100.787,89.878 cw(c100.787,89.42) 101.112,89.744 ; v2@100.787,89.878 cw(c100.787,89.42) 101.112,89.744 ; v2@100.787,89.878 cw(c100.787,89.42) 101.112,89.744 ; v2@100.977,90.068 ccw(c101.436,90.068) 101.112,89.744 ; v2@100.977,90.068 ccw(c101.436,90.068) 101.112,89.744 ; v2@100.977,90.068 ccw(c101.436,90.068) 101.112,89.744
R21: Q1.1 R21.2 | length 6.1
  Top Layer w0.254: Q1.1@83.094,93.782 Q1.1@83.312,93.564
  Top Layer w0.4: R21.2@81.6,89 81.6,89.703 82.144,90.246 82.982,90.246 83.312,90.576 Q1.1@83.312,93.564
RST: C9.2 LX1.1 LX1.2 pad.0@92.75,68.182 R9.1 U1.1 WRC.1 | length 134.7
  Top Layer w0.254: v2@95.404,70.458 ccw(c95.055,70.807) 95.549,70.807 ; v2@95.549,70.307 95.549,72.791 97.638,74.879 LX1.1@97.638,76.742 ; 95.549,70.836 ccw(c96.083,70.836) v2@95.705,70.458 ; LX1.2@97.4,77.842 97.638,78.08 97.638,78.842 100.076,81.28 100.076,82.925 U1.1@100.228,83.077 ; U1.1@99.977,83.122 100.169,82.931 105.334,82.931 105.842,83.439 112.065,83.439 ; v2(112.395,83.769) 112.065,83.439 ; C9.2@123.45,96.3 123.699,96.051 123.699,95.859 R9.1@125.15,94.408 ; 124.607,94.65 cw(c124.227,94.267) R9.1@124.743,94.109 ; 124.738,94.52 ccw(c125.096,94.881) R9.1@125.098,94.373 ; LX1.1@97.48,76.584 cw(c97.099,76.204) 97.638,76.204 ; LX1.1@97.48,76.584 cw(c97.099,76.204) 97.638,76.204 ; LX1.1@97.48,76.584 cw(c97.099,76.204) 97.638,76.204 ; LX1.2@97.48,78 ccw(c97.099,78.38) 97.638,78.38 ; LX1.2@97.48,78 ccw(c97.099,78.38) 97.638,78.38 ; LX1.2@97.48,78 ccw(c97.099,78.38) 97.638,78.38 ; 97.638,76.204 cw(c98.176,76.204) LX1.1@97.795,76.584 ; 97.638,76.204 cw(c98.176,76.204) LX1.1@97.795,76.584 ; 97.638,76.204 cw(c98.176,76.204) LX1.1@97.795,76.584 ; 97.638,78.38 ccw(c98.176,78.38) LX1.2@97.795,78 ; 97.638,78.38 ccw(c98.176,78.38) LX1.2@97.795,78 ; 97.638,78.38 ccw(c98.176,78.38) LX1.2@97.795,78 ; U1.1@99.738,82.99 cw(c98.922,82.175) 100.076,82.175 ; U1.1@99.738,82.99 cw(c98.922,82.175) 100.076,82.175 ; U1.1@99.738,82.99 cw(c98.922,82.175) 100.076,82.175 ; U1.1@99.918,83.17 cw(c99.535,82.788) 100.076,82.788 ; U1.1@99.918,83.17 cw(c99.535,82.788) 100.076,82.788 ; U1.1@99.918,83.17 cw(c99.535,82.788) 100.076,82.788 ; U1.1@99.943,83.042 ccw(c100.563,82.856) 100.002,82.533 ; U1.1@99.943,83.042 ccw(c100.563,82.856) 100.002,82.533 ; U1.1@99.943,83.042 ccw(c100.563,82.856) 100.002,82.533 ; U1.1@100.422,82.977 cw(c100.59,82.741) 100.735,82.992 ; U1.1@100.422,82.977 cw(c100.59,82.741) 100.735,82.992 ; U1.1@100.422,82.977 cw(c100.59,82.741) 100.735,82.992 ; U1.1@100.437,83.164 ccw(c101.001,83.728) 101.001,82.931 ; U1.1@100.437,83.164 ccw(c101.001,83.728) 101.001,82.931 ; U1.1@100.437,83.164 ccw(c101.001,83.728) 101.001,82.931 ; 111.084,83.439 ccw(c111.084,85.081) v2@112.244,83.92 ; 111.084,83.439 ccw(c111.084,85.081) v2@112.244,83.92 ; 111.084,83.439 ccw(c111.084,85.081) v2@112.244,83.92 ; 111.611,83.554 cw(c111.978,82.919) v2@112.301,83.578 ; 111.611,83.554 cw(c111.978,82.919) v2@112.301,83.578 ; 111.611,83.554 cw(c111.978,82.919) v2@112.301,83.578 ; 111.697,83.439 ccw(c111.697,84.467) v2@112.424,83.74 ; 111.697,83.439 ccw(c111.697,84.467) v2@112.424,83.74 ; 111.697,83.439 ccw(c111.697,84.467) v2@112.424,83.74 ; 111.943,83.463 ccw(c111.693,83.896) v2@112.185,83.807 ; 111.943,83.463 ccw(c111.693,83.896) v2@112.185,83.807 ; 111.943,83.463 ccw(c111.693,83.896) v2@112.185,83.807 ; 112.024,83.793 cw(c112.231,83.435) v2@112.413,83.806 ; 112.024,83.793 cw(c112.231,83.435) v2@112.413,83.806 ; 112.024,83.793 cw(c112.231,83.435) v2@112.413,83.806 ; 112.052,83.526 cw(c112.242,83.197) v2@112.34,83.563 ; 112.052,83.526 cw(c112.242,83.197) v2@112.34,83.563 ; 112.052,83.526 cw(c112.242,83.197) v2@112.34,83.563 ; 112.065,83.439 ccw(c111.778,83.726) v2@112.183,83.754 ; 112.065,83.439 cw(c112.351,83.152) v2@112.38,83.557 ; 112.065,83.439 ccw(c111.778,83.726) v2@112.183,83.754 ; 112.065,83.439 cw(c112.351,83.152) v2@112.38,83.557 ; 112.065,83.439 ccw(c111.778,83.726) v2@112.183,83.754 ; 112.065,83.439 cw(c112.351,83.152) v2@112.38,83.557 ; C9.2@123.454,96.19 cw(c123.028,95.166) 124.1,95.453 ; C9.2@123.454,96.19 cw(c123.028,95.166) 124.1,95.453 ; C9.2@123.454,96.19 cw(c123.028,95.166) 124.1,95.453 ; C9.2@123.5,95.927 cw(c123.5,95.612) C9.2@123.723,95.835 ; C9.2@123.5,95.927 cw(c123.5,95.612) C9.2@123.723,95.835 ; C9.2@123.5,95.927 cw(c123.5,95.612) C9.2@123.723,95.835 ; C9.2@123.552,96.425 cw(c123.278,95.767) C9.2@123.967,95.951 ; C9.2@123.552,96.425 cw(c123.278,95.767) C9.2@123.967,95.951 ; C9.2@123.552,96.425 cw(c123.278,95.767) C9.2@123.967,95.951 ; C9.2@123.619,96.3 ccw(c124.492,96.3) 123.875,95.683 ; C9.2@123.619,96.3 ccw(c124.492,96.3) 123.875,95.683 ; C9.2@123.619,96.3 ccw(c124.492,96.3) 123.875,95.683 ; C9.2@123.873,96.3 ccw(c125.359,96.3) 124.308,95.249 ; C9.2@123.873,96.3 ccw(c125.359,96.3) 124.308,95.249 ; C9.2@123.873,96.3 ccw(c125.359,96.3) 124.308,95.249 ; 124.14,95.418 cw(c122.722,94) R9.1@124.727,94 ; 124.14,95.418 cw(c122.722,94) R9.1@124.727,94 ; 124.14,95.418 cw(c122.722,94) R9.1@124.727,94 ; 124.454,95.017 ccw(c125.902,95.405) R9.1@125.159,94.103 ; 124.454,95.017 ccw(c125.902,95.405) R9.1@125.159,94.103 ; 124.454,95.017 ccw(c125.902,95.405) R9.1@125.159,94.103 ; 124.573,94.984 cw(c123.589,94) R9.1@124.981,94 ; 124.573,94.984 cw(c123.589,94) R9.1@124.981,94 ; 124.573,94.984 cw(c123.589,94) R9.1@124.981,94 ; R9.1@124.612,94.429 ccw(c125.477,94.66) R9.1@125.033,93.883 ; R9.1@124.612,94.429 ccw(c125.477,94.66) R9.1@125.033,93.883 ; R9.1@124.612,94.429 ccw(c125.477,94.66) R9.1@125.033,93.883 ; R9.1@124.777,94.186 ccw(c124.337,94.441) 124.828,94.572 ; R9.1@124.777,94.186 ccw(c124.337,94.441) 124.828,94.572 ; R9.1@124.777,94.186 ccw(c124.337,94.441) 124.828,94.572 ; 125.007,94.551 cw(c124.456,94) R9.1@125.235,94 ; 125.007,94.551 cw(c124.456,94) R9.1@125.235,94 ; 125.007,94.551 cw(c124.456,94) R9.1@125.235,94
  Top Layer w0.3: pad.0@92.75,68.182 pad.0@93.337,68.182
  Top Layer w0.5: WRC.1@120.349,89.277 ccw(c120.474,89.678) 120.774,89.384 ccw(c121.073,89.089) WRC.1@120.675,88.957 ; R9.1@124.851,93.981 cw(c123.071,93.845) 124.333,92.583 ; 125.102,93.352 ccw(c124.501,93.954) R9.1@125.349,94.019 ; R9.1@125.15,94.408 125.15,93.4 ; WRC.1@120.2,88.8 ccw(c120.213,90.167) 121.179,89.2 ; WRC.1@120.2,88.8 ccw(c120.213,90.167) 121.179,89.2 ; WRC.1@120.2,88.8 cw(c121.576,88.021) 121.181,89.552 ; WRC.1@120.2,88.8 ccw(c120.213,90.167) 121.179,89.2 ; WRC.1@120.2,88.8 cw(c121.576,88.021) 121.181,89.552 ; WRC.1@120.2,88.8 cw(c121.576,88.021) 121.181,89.552 ; WRC.1@120.2,88.8 120.779,88.8 122.022,90.043 ; WRC.1@120.205,89.3 ccw(c120.228,91.837) 122.022,90.043 ; WRC.1@120.205,89.3 ccw(c120.228,91.837) 122.022,90.043 ; WRC.1@120.205,89.3 ccw(c120.228,91.837) 122.022,90.043 ; 122.022,90.043 122.022,91.923 122.682,92.583 124.333,92.583 ; 124.333,92.583 125.15,93.4 ; R9.1@124.974,93.822 cw(c124.555,93.4) 125.15,93.4 ; R9.1@124.974,93.822 cw(c124.555,93.4) 125.15,93.4 ; R9.1@124.974,93.822 cw(c124.555,93.4) 125.15,93.4 ; 125.15,93.4 cw(c125.745,93.4) R9.1@125.326,93.822 ; 125.15,93.4 cw(c125.745,93.4) R9.1@125.326,93.822 ; 125.15,93.4 cw(c125.745,93.4) R9.1@125.326,93.822
  Bottom Layer w0.254: v2(112.395,83.769) 113.259,84.633 117.754,84.633 120.2,87.078 ; 112.759,84.133 ccw(c113.122,83.769) 112.608,83.769 cw(c113.122,83.769) 112.759,84.133 ; 112.759,84.133 cw(c112.395,84.496) 112.395,83.982 ccw(c112.395,84.496) 112.759,84.133
  Bottom Layer w0.3: pad.0@92.75,68.182 pad.0@92.75,68.849
  Bottom Layer w0.5: pad.0@92.75,68.849 94.209,70.307 v2(95.555,70.307)
  Bottom Layer w0.7: 120.2,87.078 WRC.1@120.2,88.8 ; 120.2,87.834 ccw(c119.234,87.834) 119.917,88.517 cw(c119.234,87.834) 120.2,87.834 ; 120.2,87.834 cw(c121.166,87.834) 120.483,88.517 ccw(c121.166,87.834) 120.2,87.834
  other v10: 91.897,68.326
RT: 